# EAGLE board jetson (EAGLE 8.6.3)
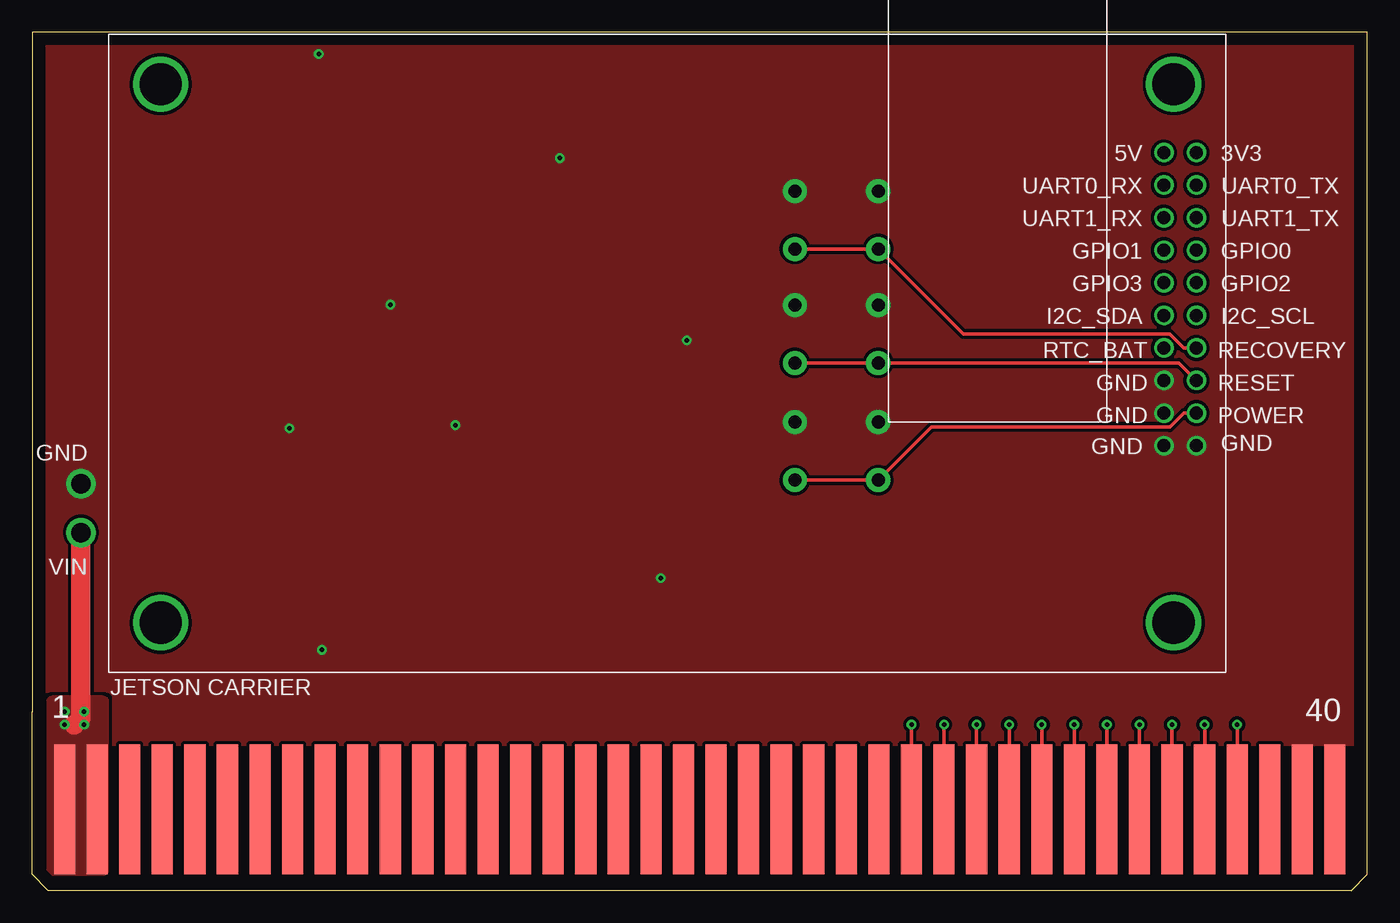
[diagram p0: board, top side]
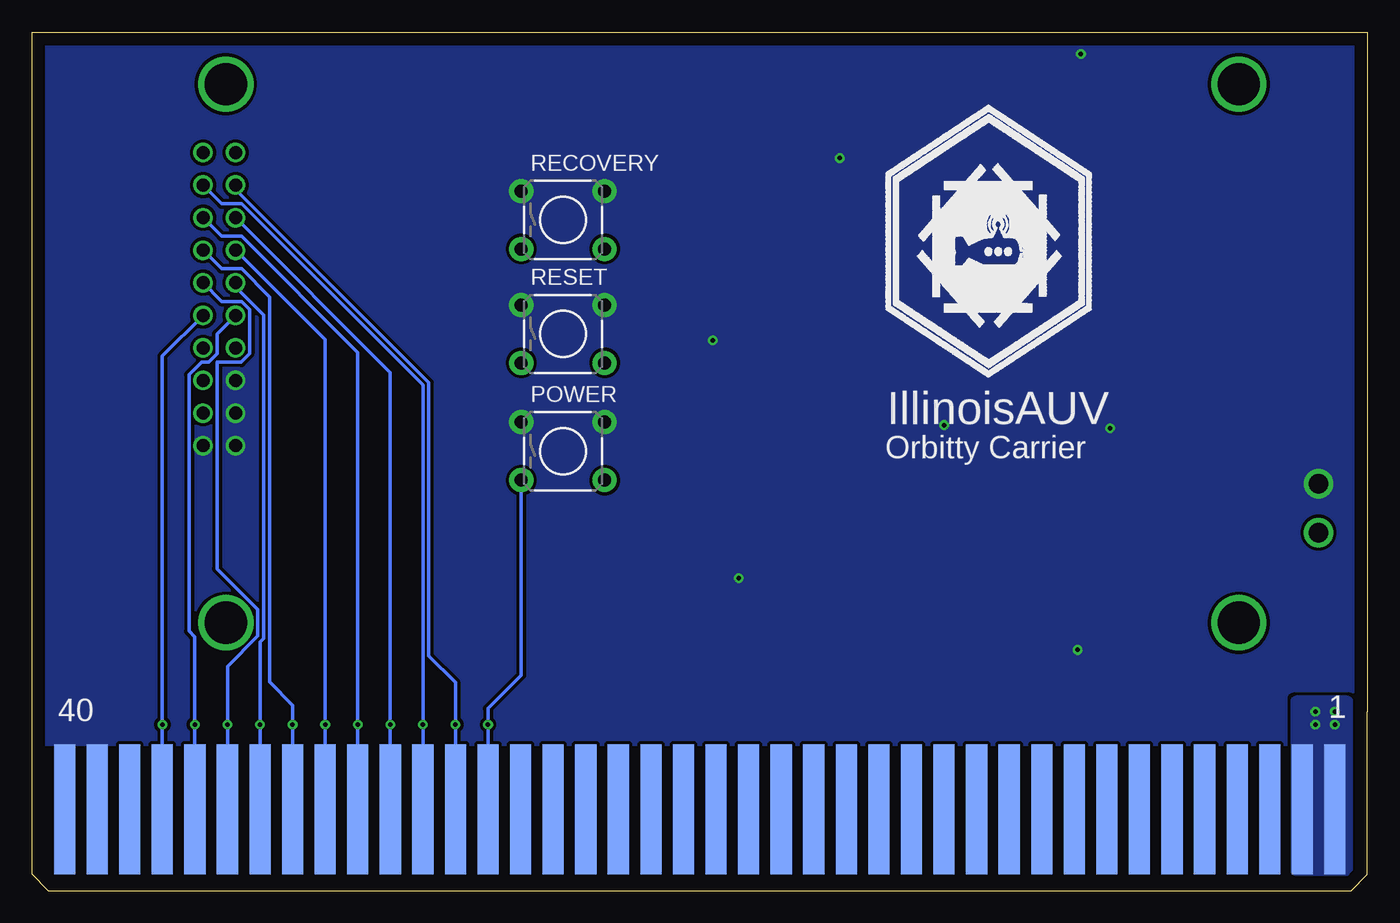
[diagram p1: board, bottom side, seen from below]

Size 104.14 x 66.98 mm. Coordinates in mm from the lower left corner, seen from the top.
Outline: 104.14,13.97 104.14,66.98 0,66.98 0,13.97
Copper layers (1*16): Top 0.035mm / dielectric 1.5mm / Bottom 0.035mm
Design rules "PCBway": minimum track width 6mil, minimum drill 0.3mm, track to track 0.205mm, track to pad 0.205mm, pad to pad 0.205mm, via to via 0.205mm, smd to smd 8mil, copper to edge 40mil, drill to drill 8mil, minimum pad ring 10mil, minimum via ring 8mil, stop-mask expansion 4mil, vias tented up to drill 25mil, thermal gap 10mil

## Footprints (pad centres in the part's own frame; a part is rotated, then mirrored left to right if it is on the bottom)
80-PIN-CARD-EDGE = smd 1.651 x 10.16: 1 -49.53,0; 2 -46.99,0; 3 -44.45,0; 4 -41.91,0; 5 -39.37,0; 6 -36.83,0; 7 -34.29,0; 8 -31.75,0; 9 -29.21,0; 10 -26.67,0; 11 -24.13,0; 12 -21.59,0; 13 -19.05,0; 14 -16.51,0; 15 -13.97,0; 16 -11.43,0; 17 -8.89,0; 18 -6.35,0; 19 -3.81,0; 20 -1.27,0; 21 1.27,0; 22 3.81,0; 23 6.35,0; 24 8.89,0; 25 11.43,0; 26 13.97,0; 27 16.51,0; 28 19.05,0; 29 21.59,0; 30 24.13,0; 31 26.67,0; 32 29.21,0; 33 31.75,0; 34 34.29,0; 35 36.83,0; 36 39.37,0; 37 41.91,0; 38 44.45,0; 39 46.99,0; 40 49.53,0 | smd 1.651 x 10.16 bottom: 41 -49.53,0; 42 -46.99,0; 43 -44.45,0; 44 -41.91,0; 45 -39.37,0; 46 -36.83,0; 47 -34.29,0; 48 -31.75,0; 49 -29.21,0; 50 -26.67,0; 51 -24.13,0; 52 -21.59,0; 53 -19.05,0; 54 -16.51,0; 55 -13.97,0; 56 -11.43,0; 57 -8.89,0; 58 -6.35,0; 59 -3.81,0; 60 -1.27,0; 61 1.27,0; 62 3.81,0; 63 6.35,0; 64 8.89,0; 65 11.43,0; 66 13.97,0; 67 16.51,0; 68 19.05,0; 69 21.59,0; 70 24.13,0; 71 26.67,0; 72 29.21,0; 73 31.75,0; 74 34.29,0; 75 36.83,0; 76 39.37,0; 77 41.91,0; 78 44.45,0; 79 46.99,0; 80 49.53,0
TACTILE-PTH = drill 1.016 pad 1.88: 1 -3.251,2.261; 2 3.251,2.261; 3 -3.251,-2.261; 4 3.251,-2.261
ORBITTY_CARRIER = drill 1.016: 3V3 41.275,15.672; 5V 38.735,15.672; GND 41.275,-7.188; GND1 38.735,-7.188; GND2 38.735,-4.648; GND3 38.735,-2.108; GPIO0 41.275,8.052; GPIO1 38.735,8.052; GPIO2 41.275,5.512; GPIO3 38.735,5.512; I2C_SCL 41.275,2.972; I2C_SDA 38.735,2.972; POWER_BUTTON 41.275,-4.648; RECOVERY 41.275,0.432; RESET 41.275,-2.108; RTC_BAT 38.735,0.432; UART0_RX 38.735,13.132; UART0_TX 41.275,13.132; UART1_RX 38.735,10.592; UART1_TX 41.275,10.592 | drill 1.524: GND4 -45.72,-10.16; VIN -45.72,-13.97 | drill 3.3: P$1 -39.497,21.006; P$2 -39.497,-21.006; P$3 39.497,-21.006; P$4 39.497,21.006

## Placement (x,y rotation side)
J101  80-PIN-CARD-EDGE  [80-PIN-CARD-EDGE]  52.07,6.35 0 top
POWER  [TACTILE-PTH]  62.74,34.29 0 bottom
RECOVERY  [TACTILE-PTH]  62.74,52.32 0 bottom
RESET  [TACTILE-PTH]  62.74,43.43 0 bottom
U$1  ORBITTY_CARRIER  [ORBITTY_CARRIER]  49.53,41.91 0 top
U$2  ILLINOISAUV  [ILLINOISAUV]  28.57,49.1 0 bottom

## Library data of the parts
J101 POWER RECOVERY RESET U$1 U$2 = auv

## Nets
3V3: U$1.3V3
5V: U$1.5V
GND: J101.39 J101.40 J101.79 J101.80 POWER.1 POWER.2 RECOVERY.1 RECOVERY.2 RESET.1 RESET.2 U$1.GND U$1.GND1 U$1.GND2 U$1.GND3 U$1.GND4
GPIO0: J101.33 J101.73 U$1.GPIO0
GPIO1: J101.32 J101.72 U$1.GPIO1
GPIO2: J101.35 J101.75 U$1.GPIO2
GPIO3: J101.34 J101.74 U$1.GPIO3
I2C_SCL: J101.37 J101.77 U$1.I2C_SCL
I2C_SDA: J101.36 J101.76 U$1.I2C_SDA
POWER_BUTTON: J101.27 J101.67 POWER.3 POWER.4 U$1.POWER_BUTTON
RECOVERY: RECOVERY.3 RECOVERY.4 U$1.RECOVERY
RESET: RESET.3 RESET.4 U$1.RESET
UART0_RX: J101.28 J101.68 U$1.UART0_RX
UART0_TX: J101.29 J101.69 U$1.UART0_TX
UART1_RX: J101.30 J101.70 U$1.UART1_RX
UART1_TX: J101.31 J101.71 U$1.UART1_TX
VIN: J101.1 J101.2 J101.41 J101.42 U$1.VIN

## Tracks (layer width: path | path; a pad name or v marks a point on that pad's centre or on a via)
GND  (via drill 0.35)
  other vias: 27.94,45.72 20.07,36.07 33.02,36.32 41.15,57.15 22.35,65.28 49.02,24.38 22.61,18.8 51.05,42.93
  pour Top (isolate 0.254, rank 6, no thermals): 0,66.8 0,11.43 104.14,11.43 104.14,66.8
  pour Bottom (isolate 0.254, rank 6, no thermals): 104.14,66.8 104.14,11.43 0,11.43 0,66.8
GPIO0  (via drill 0.35)
  Top 0.254: J101.33 v83.82,12.95
  Bottom 0.254: U$1.GPIO0 89.36,48.52 87.81,48.52 85.62,46.32 85.62,16.28 83.82,14.48 v83.82,12.95 J101.33
GPIO1  (via drill 0.35)
  Top 0.254: J101.72 v81.28,12.95
  Bottom 0.254: U$1.GPIO1 81.28,42.98 v81.28,12.95 J101.72
GPIO2  (via drill 0.35)
  Top 0.254: J101.75 v88.9,12.95
  Bottom 0.254: U$1.GPIO2 89.36,45.98 87.81,45.98 87.17,45.33 87.17,41.89 87.82,41.24 89.71,41.24 89.71,25.11 86.54,21.94 86.54,19.87 88.9,17.51 v88.9,12.95 J101.75
GPIO3  (via drill 0.35)
  Top 0.254: J101.34 v86.36,12.95
  Bottom 0.254: U$1.GPIO3 88.27,47.08 86.08,44.89 86.08,19.68 86.36,19.4 v86.36,12.95 J101.34
I2C_SCL  (via drill 0.35)
  Top 0.254: J101.77 v93.98,12.95
  Bottom 0.254: U$1.I2C_SCL 93.98,41.71 v93.98,12.95 J101.77
I2C_SDA  (via drill 0.35)
  Top 0.254: J101.36 v91.44,12.95
  Bottom 0.254: J101.36 v91.44,12.95 91.44,19.8 91.9,20.25 91.9,40.25 90.91,41.25 90.35,41.25 89.71,41.89 89.71,43.44 U$1.I2C_SDA
POWER_BUTTON  (via drill 0.35)
  Top 0.254: POWER.4 POWER.3 70.13,36.17 88.72,36.17 89.81,37.26 U$1.POWER_BUTTON | J101.67 v68.58,12.95
  Bottom 0.254: POWER.3 65.99,16.81 68.58,14.22 v68.58,12.95 J101.67
RECOVERY
  Top 0.254: RECOVERY.4 RECOVERY.3 72.62,43.44 88.72,43.44 89.81,42.34 U$1.RECOVERY
RESET
  Top 0.254: RESET.4 RESET.3 89.43,41.17 U$1.RESET
UART0_RX  (via drill 0.35)
  Top 0.254: J101.68 v71.12,12.95
  Bottom 0.254: U$1.UART0_RX 88.27,54.7 73.2,39.63 73.2,18.34 71.12,16.26 v71.12,12.95 J101.68
UART0_TX  (via drill 0.35)
  Top 0.254: J101.69 v73.66,12.95
  Bottom 0.254: U$1.UART0_TX 89.36,53.6 87.81,53.6 73.66,39.44 v73.66,12.95 J101.69
UART1_RX  (via drill 0.35)
  Top 0.254: J101.70 v76.2,12.95
  Bottom 0.254: U$1.UART1_RX 76.2,40.44 v76.2,12.95 J101.70
UART1_TX  (via drill 0.35)
  Top 0.254: J101.71 v78.74,12.95
  Bottom 0.254: U$1.UART1_TX 89.36,51.06 87.81,51.06 78.74,41.98 v78.74,12.95 J101.71
VIN  (via drill 0.35)
  Top 1.524: U$1.VIN 3.81,13.46 3.3,12.95
  other vias: 2.54,13.97 4.06,13.97 2.54,12.95 4.06,12.95
  pour Bottom (no thermals): 5.51,14.73 5.51,1.68 1.6,1.68 1.6,14.73
  pour Top (no thermals): 1.6,14.73 1.6,1.68 5.51,1.68 5.51,14.73

## Text on the board
tNames: 1 | 40
bNames: Orbitty Carrier | 1 | 40